# Altium PCB NL_PCB_L.PcbDoc (part 1 of 2)
Units mm, origin at the board's own origin, x right, y up, seen from the top; angles counter-clockwise.
Board outline 403.1 x 406.53 mm, 2 copper layers (Top Layer, Bottom Layer); 55 components, 40 nets, 196 pads, 161 vias.
Unrouted connection lines stored in the file: 46.
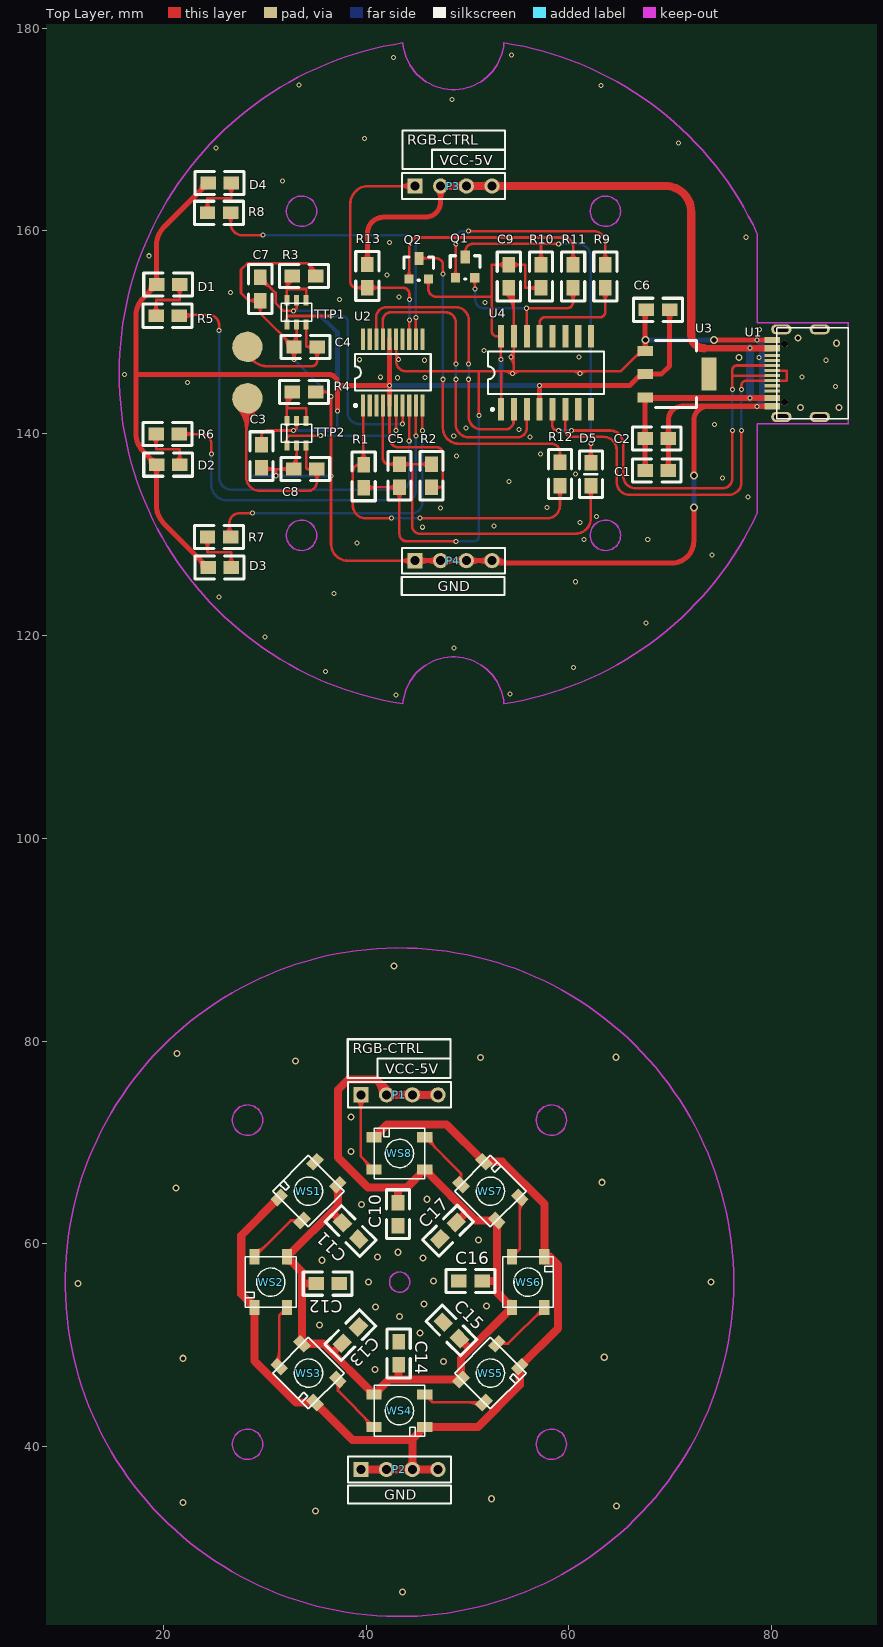
[diagram p0: Top Layer view]
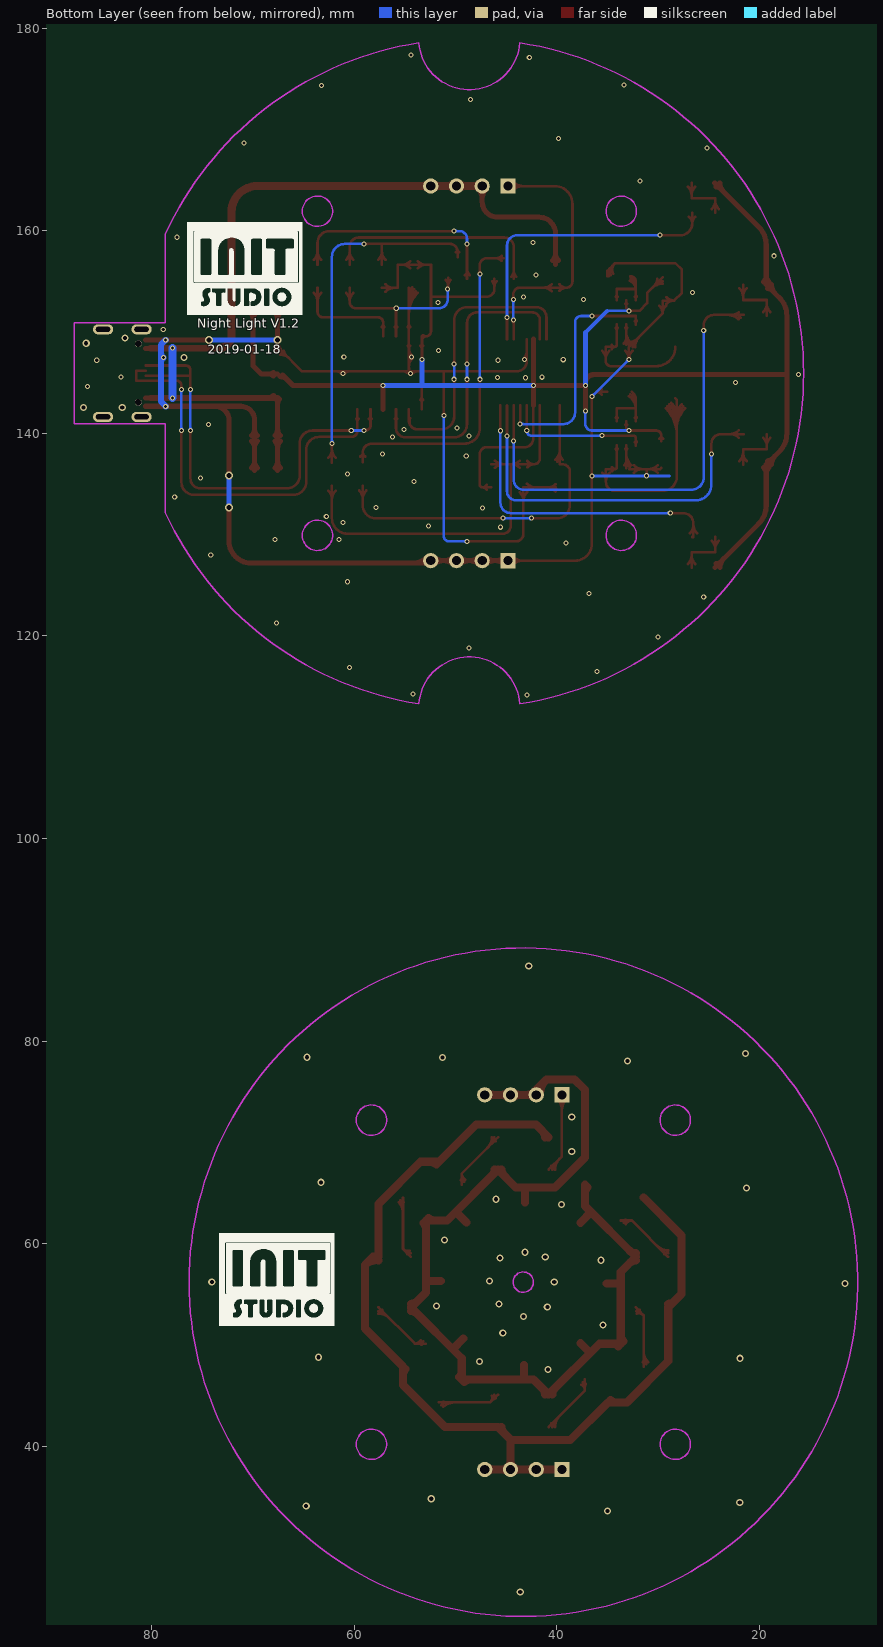
[diagram p1: Bottom Layer view, seen from below]

## Layer stack, top to bottom
Top Layer: signal copper 0.0356
Dielectric: dielectric 0.32, FR-4, Dk 4.8
Bottom Layer: signal copper 0.0356

## Board outline
-159.131,277.876 -89.154,207.899 -89.154,-128.651 190.881,-128.651 233.807,-85.725 243.967,-75.565 243.967,264.287

## Design rules (kind name [scope] priority, off if disabled: settings)
Clearance [All] p1: gap=0.1
PolygonConnect [All] p1: connectstyle=Relief reliefconductorwidth=0.254 reliefentries=4 polygonreliefangle="90 Angle"
RoutingVias [All] p1: holewidth=0.711 width=1.27 viastyle="Through Hole" minholewidth=0.711 minwidth=1.27 maxholewidth=0.711 maxwidth=1.27
SilkscreenOverComponentPads [IsPad] p1: minsilkscreentomaskgap=0.254
SolderMaskExpansion [All] p1: expansion=0.102
Width [All] p1: maxlimit=2 minlimit=0.254 preferedwidth=0.254
27 further rules are at their usual default settings.

## Components (designator, comment, footprint, x,y, rotation, side; value= is the part's Value field where it differs from the comment)
C1 "Cap" 0805 69.825,136.322 r180 top
C2 "Cap" 0805 69.825,139.497 r180 top
C3 "Cap" 0805 29.667,136.601 r90 top
C4 "Cap" 0805 32.868,148.514 r0 top
C5 "Cap" 0805 43.282,134.671 r90 top
C6 "Cap" 0805 67.666,152.197 r0 top
C7 "Cap" 0805 29.54,153.111 r90 top
C8 "Cap" 0805 32.842,136.474 r0 top
C9 "Cap" 0805 54.077,154.356 r90 top
C10 "Cap" 0805 43.129,61.773 r90 top
C11 "Cap" 0805 39.268,60.452 r135 top
C12 "Cap" 0805 37.338,56.058 r180 top
C13 "Cap" 0805 39.243,51.791 r225 top
C14 "Cap" 0805 43.205,50.317 r270 top
C15 "Cap" 0805 47.6,52.248 r315 top
C16 "Cap" 0805 49.149,56.312 r0 top
C17 "Cap" 0805 47.269,60.477 r45 top
D1 "LED0" 0805 19.304,154.686 r0 top
D2 "LED0" 0805 19.304,136.906 r0 top
D3 "LED0" 0805 24.384,126.746 r0 top
D4 "LED0" 0805 24.384,164.719 r0 top
D5 "DIODE" 0805L 62.052,134.823 r90 top
P1 "Header 4" HDR1X4 39.472,74.701 r0 top
P2 "Header 4" HDR1X4 39.472,37.719 r0 top
P3 "Header 4" HDR1X4 44.806,164.414 r0 top
P4 "Header 4" HDR1X4 44.806,127.432 r0 top
Q1 "8050" SOT23 49.759,156.388 r0 top
Q2 "8550" SOT23 45.187,156.261 r0 top
R1 "Res2" 0805 39.751,134.62 r90 top
R2 "Res2" 0805 46.457,136.957 r270 top
R3 "Res2" 0805 35.001,155.524 r180 top
R4 "Res2" 0805 35.001,144.094 r180 top
R5 "Res2" 0805 19.253,151.613 r0 top
R6 "Res2" 0805 19.253,139.929 r0 top
R7 "Res2" 0805 24.333,129.769 r0 top
R8 "Res2" 0805 24.333,161.773 r0 top
R9 "Res2" 0805 63.602,154.356 r90 top (schematic designator R13)
R10 "Res2" 0805 57.252,154.356 r90 top (schematic designator R14)
R11 "Res2" 0805 60.427,156.642 r270 top (schematic designator R15)
R12 "Res2" 0805 59.131,134.849 r90 top (schematic designator R16)
R13 "Res2" 0805 40.107,154.381 r90 top (schematic designator R17)
TTP1 "TTP" SOT23-6L 33.122,151.943 r90 top
TTP2 "TTP" SOT23-6L 33.122,140.005 r90 top
U1 "Type_C_16" Type_C16 82.575,145.948 r0 top
U2 "STM32f030F4P6" SSOP20 42.393,145.974 r90 top
U3 "AMS1117_3.3" SOT-223 67.539,148.133 r270 top
U4 "CH340C" SOP16 57.76,145.974 r0 top
WS1 "WS2812" WS2812 34.301,65.19 r225 top
WS2 "WS2812" WS2812 30.582,56.21 r270 top
WS3 "WS2812" WS2812 34.301,47.23 r315 top
WS4 "WS2812" WS2812 43.282,43.51 r0 top
WS5 "WS2812" WS2812 52.262,47.23 r45 top
WS6 "WS2812" WS2812 55.982,56.21 r90 top
WS7 "WS2812" WS2812 52.262,65.19 r135 top
WS8 "WS2812" WS2812 43.282,68.91 r180 top

## Footprints (in the part's own frame and the unit in brackets; to place one, negate y for a bottom-side part, rotate by r counter-clockwise, add the part's x,y. Pads: shape width x height; smd on the part's side, far side on the other; paste and mask are expansions set on the pad)
0805 [mil]
  rect 60x50 smd: 1(0,0) 2(90,0)
  silkscreen extent -50,-45 140,45
0805L [mil]
  rect 60x50 smd: 1(0,-5) 2(90,-5)
  silkscreen extent -45,-50 135,40
HDR1X4 [mm] "Connector; Header; 4 Position"
  rect 1.5x1.5 hole 0.9: 1(0,0)
  round 1.5 hole 0.9: 2(2.54,0) 3(5.08,0) 4(7.62,0)
  silkscreen extent -1.27,-1.27 8.89,1.27
SOP16 [mm] "Small Outline; 16 Leads; Body Width 5"
  rect 0.6x2.2 smd: 1(-4.445,-3.6) 2(-3.175,-3.6) 3(-1.905,-3.6) 4(-0.635,-3.6) 5(0.635,-3.6) 6(1.905,-3.6) 7(3.175,-3.6) 8(4.445,-3.6) 9(4.445,3.6) 10(3.175,3.6) 11(1.905,3.6) 12(0.635,3.6) 13(-0.635,3.6) 14(-1.905,3.6) 15(-3.175,3.6) 16(-4.445,3.6)
  silkscreen extent -5.73,-3.72 5.73,2.1, body extent -5.1,-3.96 5.1,3.96, height 1.8
SOT23 [mil]
  rect 36x36 smd: B(-37.5,-40) E(37.5,-40)
  rect 36x50 smd: C(0.5,40)
  silkscreen extent -58,-45 58,45, body extent -58,-48 60,56, height 43
SOT23-6L [mm]
  rect 1x0.5 smd: 1(-1.2,0.95) 2(-1.2,0) 3(-1.2,-0.95) 4(1.2,-0.95) 5(1.2,0) 6(1.2,0.95)
  silkscreen extent -0.9,-1.5 0.9,1.5
SOT-223 [mil]
  rect 39x59 smd: 1(0,0) 3(180,0)
  rect 38.98x59.05 smd: 2(90,0)
  rect 129.13x59 smd: 4(90,248.03)
  silkscreen extent -40,40 220,200
SSOP20 [mm]
  rect 2.15x0.4 smd: 1(-3.224,2.696) 2(-3.224,2.046) 3(-3.224,1.396) 4(-3.224,0.746) 5(-3.224,0.096) 6(-3.224,-0.554) 7(-3.224,-1.204) 8(-3.224,-1.854) 9(-3.224,-2.504) 10(-3.224,-3.154) 11(3.326,-3.154) 12(3.326,-2.504) 13(3.326,-1.854) 14(3.326,-1.204) 15(3.326,-0.554) 16(3.326,0.096) 17(3.326,0.746) 18(3.326,1.396) 19(3.326,2.046) 20(3.326,2.696)
  silkscreen extent -3.35,-3.98 1.85,3.57
Type_C16 [mm]
  round 0.65 hole 0.65: 0(-1.28,2.89) 1(-1.28,-2.89)
  rect 1.5x0.6 smd: 1(-2.5,3.275) 2(-2.5,2.45) 11(-2.5,-2.45) 12(-2.5,-3.275)
  rect 1.5x0.3 smd: 3(-2.5,1.75) 4(-2.5,1.25) 5(-2.5,0.75) 6(-2.5,0.25) 7(-2.5,-0.25) 8(-2.5,-0.75) 9(-2.5,-1.25) 10(-2.5,-1.75)
  oval 2x1 hole 0.5 slot 1.4 at 0 deg: ""(-1.6,-4.32) ""(-1.6,4.32) ""(2.2,-4.32) ""(2.2,4.32)
  silkscreen extent -2.05,-4.5 5,4.5
WS2812 [mm]
  rect 1.5x1 smd: 1(-2.5,1.6) 2(-2.5,-1.6) 3(2.5,-1.6) 4(2.5,1.6)
  silkscreen extent -2.5,-2.5 2.5,2.5

## Part data
C1 C2 C3 C4 C5 C6 C7 C8 C9 C10 C11 C12 C13 C14 C15 C16 C17: "Capacitor"
D1 D2 D3 D4: "Typical INFRARED GaAs LED"
D5: library part D
P1 P2 P3 P4: "Header, 4-Pin"
R1 R2 R3 R4 R5 R6 R7 R8 R9 R10 R11 R12 R13: "Resistor"
TTP1 TTP2: library part TT
U1: library part Type_
U3: library part LM317, "3-Terminal Adjustable Positive Voltage Reg"
WS1 WS2 WS3 WS4 WS5 WS6 WS7 WS8: library part WS

## Free pads (board coordinates)
  round 3 smd: 0(28.27,143.459) 1(28.27,148.539)

## Via types
v1: diameter 0.5, hole 0.3, Top Layer to Bottom Layer, 117 vias
v2: diameter 0.7, hole 0.4, Top Layer to Bottom Layer, 40 vias
v3: diameter 0.8, hole 0.5, Top Layer to Bottom Layer, 4 vias

## Nets (pads, with @x,y where several pads share a name; then routed paths per layer and width w, separated by ;. In a path a pad name is that pad's centre, name@x,y a point inside that pad or via, vN(x,y) a via of type N, cw(c..) or ccw(c..) an arc to the next point about the centre after c; other vN are vias at no path point)
5V: C1.2 C2.2 C10.2 C11.2 C12.2 C13.2 C14.2 C15.2 C16.2 C17.2 P1.2 P1.3 P1.4 P3.2 P3.3 P3.4 R13.2 U1.2 U1.11 U3.3 WS1.1 WS2.1 WS3.1 WS4.1 WS5.1 WS6.1 WS7.1 WS8.1 | length 223
  Top Layer w0.5: R13.2@39.834,157.066 ccw(c39.177,157.724) 40.107,157.724 ccw(c41.036,157.724) R13.2@40.379,157.066 ; R13.2@40.107,156.667 40.107,159.715 cw(c41.732,159.715) 41.732,161.341 45.822,161.341 ccw(c45.822,162.865) 47.346,162.865 P3.2@47.346,164.414 ; P3.2@46.992,164.061 cw(c46.138,163.207) 47.346,163.207 cw(c48.553,163.207) P3.2@47.699,164.061 ; C1.2@67.266,136.594 ccw(c66.609,137.251) 67.539,137.251 ccw(c68.468,137.251) C1.2@67.811,136.594 ; C2.2@67.266,139.225 cw(c66.609,138.567) 67.539,138.567 cw(c68.468,138.567) C2.2@67.811,139.225 ; C2.2@67.266,139.769 ccw(c66.609,140.426) 67.539,140.426 ccw(c68.468,140.426) C2.2@67.811,139.769 ; U3.3@67.365,143.387 cw(c66.946,142.969) 67.539,142.969 cw(c68.131,142.969) U3.3@67.712,143.387 ; C1.2@67.539,136.322 C2.2@67.539,139.497 U3.3@67.539,143.561 ; U1.11@80.075,143.498 U1.11@80.575,143.498 ; U1.2@80.075,148.398 U1.2@80.575,148.398
  Top Layer w0.6: U3.3@67.539,143.498 U1.11@80.075,143.498 ; U3.3@67.931,143.699 ccw(c68.415,144.183) 68.415,143.498 ; 73.355,148.398 U1.2@80.075,148.398
  Top Layer w0.8: WS2.1@32.182,58.36 cw(c32.182,57.515) 32.779,58.113 ; WS2.1@32.182,59.06 ccw(c32.182,59.905) 32.779,59.308 ; WS3.1@33.417,50.377 ccw(c32.82,50.974) 33.665,50.974 ; 33.817,56.058 C12.2@35.052,56.058 ; WS3.1@33.912,49.882 cw(c34.51,49.284) 34.51,50.129 ; 36.596,63.125 C11.2@37.652,62.068 ; 36.743,49.29 C13.2@37.627,50.174 ; WS1.1@36.953,65.579 cw(c36.356,64.982) 37.2,64.982 ; WS1.1@37.2,65.827 37.2,63.729 WS2.1@32.182,58.71 33.665,57.227 WS3.1@33.665,50.129 35.763,50.129 WS4.1@40.782,45.11 42.265,46.594 WS5.1@49.363,46.594 49.363,48.691 WS6.1@54.382,53.71 52.898,55.194 WS7.1@52.898,62.291 50.8,62.291 WS8.1@45.782,67.31 44.029,65.557 40.157,65.557 37.2,68.514 37.2,75.199 38.227,76.225 40.996,76.225 42.012,75.209 P1.2@42.012,74.701 P1.4@47.092,74.701 ; 40.184,45.708 cw(c39.587,45.11) WS4.1@40.432,45.11 ; 41.055,76.166 cw(c39.59,74.701) P1.2@41.662,74.701 ; WS4.1@41.132,45.11 cw(c41.977,45.11) 41.379,45.708 ; P1.2@42.259,74.454 cw(c42.857,73.856) 42.857,74.701 cw(c42.857,75.546) P1.2@42.259,74.949 ; C10.2@43.129,64.059 43.129,65.532 ; 43.205,46.695 C14.2@43.205,48.031 ; P1.3@44.304,74.454 ccw(c43.707,73.856) 43.707,74.701 ccw(c43.707,75.546) P1.3@44.304,74.949 ; P1.3@44.799,74.454 cw(c45.397,73.856) 45.397,74.701 cw(c45.397,75.546) P1.3@44.799,74.949 ; 45.184,66.713 ccw(c44.587,67.31) WS8.1@45.432,67.31 ; WS8.1@46.132,67.31 ccw(c46.977,67.31) 46.379,66.713 ; P1.4@46.844,74.454 ccw(c46.247,73.856) 46.247,74.701 ccw(c46.247,75.546) P1.4@46.844,74.949 ; P3.2@47.346,164.414 69.545,164.414 cw(c69.545,161.874) 72.085,161.874 72.085,149.668 ccw(c73.355,149.668) 73.355,148.398 ; P3.2@47.593,164.167 cw(c48.191,163.569) 48.191,164.414 cw(c48.191,165.259) P3.2@47.593,164.662 ; 48.518,46.594 cw(c48.518,45.749) WS5.1@49.115,46.346 ; C17.2@48.886,62.094 49.929,63.137 ; C15.2@49.216,50.631 50.221,49.626 ; 49.363,47.439 ccw(c50.208,47.439) WS5.1@49.61,46.841 ; P3.3@49.638,164.167 ccw(c49.041,163.569) 49.041,164.414 ccw(c49.041,165.259) P3.3@49.638,164.662 ; P3.3@50.133,164.167 cw(c50.731,163.569) 50.731,164.414 cw(c50.731,165.259) P3.3@50.133,164.662 ; C16.2@51.435,56.312 52.771,56.312 ; 52.053,62.291 ccw(c52.053,63.136) WS7.1@52.651,62.539 ; P3.4@52.178,164.167 ccw(c51.581,163.569) 51.581,164.414 ccw(c51.581,165.259) P3.4@52.178,164.662 ; P3.4@52.673,164.167 cw(c53.271,163.569) 53.271,164.414 cw(c53.271,165.259) P3.4@52.673,164.662 ; 52.898,61.446 cw(c53.743,61.446) WS7.1@53.146,62.044 ; 53.784,53.113 cw(c54.382,52.515) WS6.1@54.382,53.36 ; 53.784,54.308 ccw(c54.382,54.905) WS6.1@54.382,54.06
  Bottom Layer w0.8: v1(77.902,143.51) v1(77.902,148.412)
BOOT0: R1.2 R12.1 U2.1 | length 40.7
  Top Layer w0.254: R1.2@39.392,137.392 ccw(c38.657,138.127) 39.696,138.127 ; 39.696,137.779 ccw(c40.497,137.779) R1.2@39.931,137.213 ; 39.696,138.392 ccw(c41.11,138.392) R1.2@40.11,137.392 ; U2.1@39.696,142.75 39.696,136.957 39.446,136.957 ccw(c39.446,136.195) 38.684,136.195 38.684,132.893 ccw(c39.954,132.893) 39.954,131.623 v1(42.494,131.623) ; v1@42.407,131.536 ccw(c42.197,131.326) 42.197,131.623 ccw(c42.197,131.92) v1@42.407,131.71 ; v1(45.288,131.623) 57.861,131.623 ccw(c57.861,132.893) 59.131,132.893 R12.1@59.131,134.849 ; v1@45.375,131.536 cw(c45.585,131.326) 45.585,131.623 cw(c45.585,131.92) v1@45.375,131.71 ; R12.1@58.772,134.362 cw(c57.905,133.495) 59.131,133.495 cw(c60.358,133.495) R12.1@59.49,134.362
  Bottom Layer w0.254: v1(42.494,131.623) v1(45.288,131.623) ; v1@42.581,131.536 cw(c42.791,131.326) 42.791,131.623 cw(c42.791,131.92) v1@42.581,131.71 ; v1@45.201,131.536 ccw(c44.991,131.326) 44.991,131.623 ccw(c44.991,131.92) v1@45.201,131.71
CH340_RX: U2.17 U4.3 | length 32.8
  Top Layer w0.254: U2.17@41.646,149.3 41.646,151.181 cw(c42.408,151.181) 42.408,151.943 47.828,151.943 cw(c47.828,150.927) 48.844,150.927 v1(48.844,146.863) ; v1@48.757,145.252 cw(c48.547,145.042) 48.844,145.042 cw(c49.141,145.042) v1@48.931,145.252 ; v1@48.757,146.95 ccw(c48.547,147.16) 48.844,147.16 ccw(c49.141,147.16) v1@48.931,146.95 ; v1(48.844,145.339) 48.844,140.894 ccw(c50.114,140.894) 50.114,139.624 54.966,139.624 ccw(c54.966,140.513) 55.855,140.513 U4.3@55.855,142.374 ; U4.3@55.732,141.451 cw(c55.437,141.156) 55.855,141.156 cw(c56.272,141.156) U4.3@55.977,141.451
  Bottom Layer w0.254: v1@48.757,145.426 ccw(c48.547,145.636) 48.844,145.636 ccw(c49.141,145.636) v1@48.931,145.426 ; v1@48.757,146.776 cw(c48.547,146.566) 48.844,146.566 cw(c49.141,146.566) v1@48.931,146.776 ; v1(48.844,145.339) v1(48.844,146.863)
CH340_TX: U2.18 U4.2 | length 31.3
  Top Layer w0.254: U2.18@40.996,149.3 40.996,151.461 cw(c41.986,151.461) 41.986,152.451 48.844,152.451 cw(c48.844,151.181) 50.114,151.181 v1(50.114,146.863) ; v1@50.027,145.252 cw(c49.817,145.042) 50.114,145.042 cw(c50.411,145.042) v1@50.201,145.252 ; v1@50.027,146.95 ccw(c49.817,147.16) 50.114,147.16 ccw(c50.411,147.16) v1@50.201,146.95 ; v1(50.114,145.339) 50.114,141.656 ccw(c51.384,141.656) 51.384,140.386 53.696,140.386 ccw(c53.696,141.275) 54.585,141.275 U4.2@54.585,142.374 ; U4.2@54.435,141.487 cw(c53.844,141.146) 54.503,140.97
  Bottom Layer w0.254: v1@50.027,145.426 ccw(c49.817,145.636) 50.114,145.636 ccw(c50.411,145.636) v1@50.201,145.426 ; v1@50.027,146.776 cw(c49.817,146.566) 50.114,146.566 cw(c50.411,146.566) v1@50.201,146.776 ; v1(50.114,145.339) v1(50.114,146.863)
GND: C1.1 C2.1 C3.1 C4.1 C5.1 C6.1 C7.1 C8.1 C9.1 C10.1 C11.1 C12.1 C13.1 C14.1 C15.1 C16.1 C17.1 P2.1 P2.2 P2.3 P2.4 P4.1 P4.2 P4.3 P4.4 R1.1 R3.1 R4.1 TTP1.2 TTP2.2 U1.1@80.075,149.223 U1.12 U2.15 U3.1 U4.1 U4.15 WS1.3 WS2.3 WS3.3 WS4.3 WS5.3 WS6.3 WS7.3 WS8.3 | length 421.5
  Top Layer w0.254: C7.1@29.163,152.771 ccw(c28.397,152.079) 28.397,153.111 ; C7.1@29.163,153.452 cw(c28.397,154.143) 28.397,153.111 ; C7.1@29.2,152.607 cw(c28.508,151.841) 29.54,151.841 ; C3.1@29.667,136.601 29.794,136.474 31.115,136.474 ; C7.1@29.881,152.607 ccw(c30.572,151.841) 29.54,151.841 ; C3.1@30.026,136.115 cw(c30.894,135.248) 30.894,136.474 cw(c30.894,137.701) C3.1@30.026,136.833 ; v1@31.028,135.901 ccw(c30.818,136.111) 31.115,136.111 ccw(c31.412,136.111) v1@31.202,135.901 ; v1(31.115,135.814) 31.115,136.474 ; 31.784,149.598 cw(c30.7,148.514) C4.1@32.233,148.514 ; 32.09,149.291 ccw(c32.741,149.942) C4.1@32.741,149.022 ; 32.217,149.164 cw(c31.567,148.514) C4.1@32.487,148.514 ; C8.1@32.356,136.115 ccw(c31.489,135.248) 31.489,136.474 ccw(c31.489,137.701) C8.1@32.356,136.833 ; C4.1@32.51,148.153 cw(c31.659,147.295) v1(32.868,147.295) ; C8.1@32.61,136.833 ccw(c31.375,138.069) 33.122,138.069 ; C4.1@32.635,148.873 ccw(c31.462,150.047) 33.122,150.047 ; v1@32.761,147.356 ccw(c32.504,147.505) 32.791,147.581 ; v1@32.781,147.382 ccw(c32.571,147.592) 32.868,147.592 ccw(c33.165,147.592) v1@32.955,147.382 ; C8.1@32.79,136.654 ccw(c31.988,137.455) 33.122,137.455 ; 32.791,147.581 ccw(c33.078,147.658) v1@32.929,147.401 ; v1@32.806,147.401 ccw(c32.658,147.658) 32.944,147.581 ; C4.1@32.815,148.693 ccw(c32.075,149.434) 33.122,149.434 ccw(c33.914,149.434) C4.1@33.354,148.873 ; C8.1@32.842,136.474 31.115,136.474 ; 32.944,147.581 ccw(c33.231,147.505) v1@32.974,147.356 ; TTP2.2@33.035,138.468 cw(c32.825,138.258) 33.122,138.258 cw(c33.419,138.258) TTP2.2@33.209,138.468 ; TTP1.2@33.035,150.406 cw(c32.825,150.196) 33.122,150.196 cw(c33.419,150.196) TTP1.2@33.209,150.406 ; C8.1@33.122,136.576 TTP2.2@33.122,138.805 ; 33.122,137.333 ccw(c33.828,137.333) C8.1@33.328,136.833 ; C4.1@33.122,148.768 TTP1.2@33.122,150.743 ; C4.1@33.225,148.153 ccw(c34.076,147.295) v1(32.868,147.295) ; R3.1@34.417,155.745 ccw(c33.59,156.145) 34.239,156.794 ; 34.492,156.541 cw(c33.931,155.98) R3.1@34.645,155.635 ; 34.745,156.289 cw(c34.272,155.815) R3.1@34.874,155.524 ; R4.1@35.001,144.094 36.068,144.094 ; R3.1@35.001,155.524 35.001,156.032 34.239,156.794 ; R4.1@35.553,143.816 cw(c36.068,143.479) 36.068,144.094 ; R4.1@35.553,144.372 ccw(c36.068,144.709) 36.068,144.094 ; v1@36.402,143.637 ccw(c36.105,143.637) 36.315,143.847 ccw(c36.525,144.057) v1@36.525,143.76 ; v1@36.438,135.701 cw(c36.228,135.491) 36.525,135.491 cw(c36.822,135.491) v1@36.612,135.701 ; v1@36.438,135.875 ccw(c36.228,136.085) 36.525,136.085 ccw(c36.822,136.085) v1@36.612,135.875 ; v1@36.438,143.55 cw(c36.228,143.34) 36.525,143.34 cw(c36.822,143.34) v1@36.612,143.55 ; R1.1@39.931,134.44 cw(c40.487,133.884) 40.487,134.671 ; R1.1@40.107,134.671 C5.1@43.282,134.671 43.282,130.073 ccw(c44.018,130.073) 44.018,129.337 v1(48.844,129.337) ; R1.1@40.11,134.261 cw(c41.1,133.271) 41.1,134.671 ; R1.1@40.11,134.979 ccw(c40.855,135.724) 40.855,134.671 ; C5.1@42.922,134.185 cw(c42.055,133.317) 43.282,133.317 cw(c44.508,133.317) C5.1@43.641,134.185 ; C5.1@42.922,134.312 ccw(c42.055,133.444) 42.055,134.671 ccw(c42.055,135.897) C5.1@42.922,135.03 ; 42.946,147.543 ccw(c43.428,147.543) v1@43.087,147.202 ; 42.946,148.156 ccw(c44.041,148.156) v1@43.267,147.382 ; U2.15@42.946,149.3 42.946,147.117 ccw(c43.937,147.117) 43.937,146.126 51.13,146.126 ; P4.1@44.365,126.991 ccw(c43.302,125.928) 43.302,127.432 ccw(c43.302,128.936) P4.1@44.365,127.872 ; P4.1@44.545,127.171 ccw(c43.915,126.541) 43.915,127.432 ccw(c43.915,128.323) P4.1@44.545,127.693 ; P4.1@44.806,127.076 ccw(c44.806,127.432) P4.1@45.161,127.432 ; P4.1@44.806,127.432 38.176,127.432 cw(c38.176,129.083) 36.525,129.083 v1(36.525,135.788) v1(36.525,143.637) 36.068,144.094 ; v1@48.757,129.25 ccw(c48.547,129.04) 48.547,129.337 ccw(c48.547,129.634) v1@48.757,129.424 ; v1@51.043,141.87 ccw(c50.833,142.08) 51.13,142.08 ccw(c51.427,142.08) v1@51.217,141.87 ; v1(51.13,141.783) 51.13,146.126 ; U4.1@53.192,143.296 ccw(c52.897,143.591) 53.315,143.591 ccw(c53.732,143.591) U4.1@53.437,143.296 ; U4.1@53.315,142.374 53.315,146.053 53.388,146.126 65.126,146.126 67.132,148.133 U3.1@67.539,148.133 ; 53.315,146.126 51.13,146.126 ; 53.588,146.126 cw(c53.588,145.049) v1@54.35,145.811 ; C9.1@53.717,153.87 cw(c51.624,151.776) 54.585,151.776 ; C9.1@53.897,154.049 cw(c52.237,152.389) 54.585,152.389 ; C9.1@54.077,154.229 cw(c52.85,153.002) 54.585,153.002 ; 54.202,146.126 cw(c54.202,145.662) v1@54.53,145.99 ; v1@54.218,147.436 cw(c53.334,146.552) 54.585,146.552 ; v1@54.218,147.61 ccw(c53.334,148.495) U4.15@54.585,148.495 ; C9.1@54.256,154.408 cw(c53.463,153.616) C9.1@54.585,153.616 ; v1@54.345,145.99 cw(c54.673,145.662) 54.673,146.126 ; v1@54.35,145.985 ccw(c53.784,146.55) 54.585,146.55 ; v1@54.398,147.431 ccw(c53.947,147.881) 54.585,147.881 ; v1@54.398,147.616 cw(c53.947,147.165) 54.585,147.165 ; U4.15@54.462,148.651 cw(c54.167,148.356) 54.585,148.356 cw(c55.002,148.356) U4.15@54.707,148.651 ; U4.15@54.462,150.496 ccw(c54.167,150.791) 54.585,150.791 ccw(c55.002,150.791) U4.15@54.707,150.496 ; v1@54.524,145.811 cw(c55.286,145.049) 55.286,146.126 ; 54.585,146.152 U4.15@54.585,149.574 C9.1@54.585,154.356 ; 60.299,146.126 cw(c60.299,145.135) v1@61,145.836 ; 60.913,146.126 cw(c60.913,145.749) v1@61.18,146.016 ; v1@60.994,146.016 cw(c61.261,145.749) 61.261,146.126 ; v1@61.174,145.836 cw(c61.875,145.135) 61.875,146.126 ; 66.396,147.396 cw(c67.285,146.507) U3.1@67.285,147.764 ; 66.764,147.764 ccw(c66.395,148.133) U3.1@66.916,148.133 ; U3.1@66.829,147.83 cw(c67.285,147.375) U3.1@67.285,148.018 ; 28.397,153.111 C7.1@29.54,153.111 29.54,151.841 ; 28.397,153.111 27.635,153.873 27.635,156.159 28.27,156.794 34.239,156.794 ; 29.54,151.841 C4.1@32.868,148.514 v1(32.868,147.295)
  Top Layer w0.5: P4.1@44.806,127.076 P4.1@44.806,127.432 45.161,127.432 P4.2@47.346,127.432 P4.4@52.426,127.432 52.654,127.203 70.18,127.203 ccw(c70.18,129.362) 72.339,129.362 v3(72.339,132.664) ; P4.1@45.159,127.078 cw(c46.013,126.225) 46.013,127.432 cw(c46.013,128.639) P4.1@45.159,127.785 ; P4.2@46.992,127.078 ccw(c46.138,126.225) 46.138,127.432 ccw(c46.138,128.639) P4.2@46.992,127.785 ; P4.2@47.699,127.078 cw(c48.553,126.225) 48.553,127.432 cw(c48.553,128.639) P4.2@47.699,127.785 ; P4.3@49.532,127.078 ccw(c48.679,126.225) 48.679,127.432 ccw(c48.679,128.639) P4.3@49.532,127.785 ; P4.3@50.239,127.078 cw(c51.093,126.225) 51.093,127.432 cw(c51.093,128.639) P4.3@50.239,127.785 ; P4.4@52.072,127.078 ccw(c51.219,126.225) 51.219,127.432 ccw(c51.218,128.639) P4.4@52.072,127.785 ; P4.4@52.779,127.785 ccw(c54.185,129.191) 54.185,127.203 ; C6.1@67.266,151.925 cw(c66.609,151.267) 67.539,151.267 cw(c68.468,151.267) C6.1@67.811,151.925 ; U3.1@67.365,148.306 ccw(c66.946,148.725) 67.539,148.725 ccw(c68.131,148.725) U3.1@67.712,148.306 ; U3.1@67.539,148.133 C6.1@67.539,152.197 ; 67.539,148.804 cw(c67.982,148.804) v3@67.668,149.117 ; 67.539,149.643 ccw(c67.982,149.643) v3@67.668,149.329 ; C1.1@69.552,136.594 ccw(c68.895,137.251) 69.825,137.251 ccw(c70.754,137.251) C1.1@70.097,136.594 ; C2.1@69.552,139.225 cw(c68.895,138.567) 69.825,138.567 cw(c70.754,138.567) C2.1@70.097,139.225 ; C2.1@69.552,139.769 ccw(c68.895,140.426) 69.825,140.426 ccw(c70.754,140.426) C2.1@70.097,139.769 ; C1.1@69.825,136.322 C2.1@69.825,139.497 69.825,141.326 cw(c71.172,141.326) 71.172,142.673 73.736,142.673 ; v3(72.339,135.839) 72.339,141.276 cw(c73.736,141.276) 73.736,142.673 ; v3(74.322,149.223) v1(78.588,149.223) U1.1@80.075,149.223 U1.1@80.575,149.223 ; U1.12@80.575,142.673 U1.12@80.075,142.673 73.736,142.673
  Top Layer w0.8: 28.384,54.308 ccw(c28.982,54.905) WS2.3@28.982,54.06 ; WS1.3@31.402,64.554 27.661,60.812 27.661,55.031 WS2.3@28.982,53.71 28.982,48.412 33.063,44.331 WS3.3@34.938,44.331 38.654,40.615 44.486,40.615 WS4.3@45.782,41.91 51.029,41.91 55.161,46.042 WS5.3@55.161,47.866 58.928,51.633 58.928,57.912 ; 34.093,44.331 ccw(c34.093,45.176) WS3.3@34.69,44.578 ; P2.1@39.472,37.719 P2.2@42.012,37.719 P2.4@47.092,37.719 ; P2.1@39.719,37.472 cw(c40.317,36.874) 40.317,37.719 cw(c40.317,38.564) P2.1@39.719,37.966 ; WS8.3@40.782,70.51 42.052,71.78 47.935,71.78 WS7.3@51.625,68.09 53.424,68.09 57.582,63.932 WS6.3@57.582,58.71 58.13,58.71 58.928,57.912 ; WS8.3@41.132,70.51 cw(c41.977,70.51) 41.379,71.108 ; P2.2@41.764,37.472 ccw(c41.167,36.874) 41.167,37.719 ccw(c41.167,38.564) P2.2@41.764,37.966 ; P2.2@42.259,37.472 cw(c42.857,36.874) 42.857,37.719 cw(c42.857,38.564) P2.2@42.259,37.966 ; P2.3@44.304,37.472 ccw(c43.707,36.874) 43.707,37.719 ccw(c43.707,38.564) 44.304,37.966 ccw(c43.707,38.564) 44.552,38.564 ccw(c45.397,38.564) 44.799,37.966 ccw(c45.397,38.564) 45.397,37.719 ccw(c45.397,36.874) P2.3@44.799,37.472 ; P2.3@44.552,37.719 44.552,40.549 ; 45.184,41.313 ccw(c44.587,41.91) WS4.3@45.432,41.91 ; P2.4@46.844,37.472 ccw(c46.247,36.874) 46.247,37.719 ccw(c46.247,38.564) P2.4@46.844,37.966 ; WS7.3@51.873,67.842 cw(c52.47,67.245) 52.47,68.09 ; WS5.3@54.914,47.619 cw(c54.316,47.021) 55.161,47.021 ; WS6.3@57.595,58.361 cw(c57.809,56.793) 58.928,57.912
  Bottom Layer w0.254: 28.854,135.788 v1(36.525,135.788) ; 30.757,135.788 ccw(c30.757,136.172) v1@31.028,135.901 ; v1@31.202,135.901 ccw(c31.473,136.172) 31.473,135.788 ; v1@32.842,147.269 ccw(c32.842,147.295) v1(32.868,147.295) v1(36.525,143.637) ; v1@32.868,147.172 cw(c32.868,146.875) 33.078,147.085 cw(c33.288,147.295) v1@32.991,147.295 ; v1@36.402,143.637 ccw(c36.105,143.637) 36.315,143.847 ccw(c36.525,144.057) v1@36.525,143.76 ; v1@36.438,135.701 ccw(c36.228,135.491) 36.228,135.788 ccw(c36.228,136.085) v1@36.438,135.875 ; v1(48.844,129.337) 50.622,129.337 ccw(c50.622,129.845) 51.13,129.845 v1(51.13,141.783) ; v1@48.931,129.25 cw(c49.141,129.04) 49.141,129.337 cw(c49.141,129.634) v1@48.931,129.424 ; v1@51.043,141.696 cw(c50.833,141.486) 51.13,141.486 cw(c51.427,141.486) v1@51.217,141.696
  Bottom Layer w0.5: v3(67.562,149.223) v3(74.322,149.223) ; v3(72.339,132.664) v3(72.339,135.839) ; v1@78.562,149.198 v1(78.588,149.223)
  Bottom Layer w0.6: v1(78.588,142.672) 79.07,143.154 79.07,148.741 v1(78.588,149.223) ; v1@78.826,147.437 ccw(c78.237,148.026) 79.07,148.026 ; v1@78.826,147.508 cw(c78.237,146.919) 79.07,146.919
  other v1: 42.926,114.173 54.178,114.249 35.992,116.484 60.452,116.893 48.666,118.821 29.997,119.888 67.64,121.26 25.476,123.85 36.805,124.206 60.655,125.349 74.143,127.991 39.091,129.184 61.493,129.502 67.793,129.515 45.542,130.734 52.629,130.861 61.087,131.216 62.738,131.801 47.32,132.613 57.836,132.664 77.699,133.706 54.077,135.23 75.159,135.585 60.655,135.991 48.92,137.764 57.201,137.973 56.185,139.624 48.641,139.725 55.067,140.36 49.835,140.513 74.371,140.894 86.309,144.628 22.352,145.034 43.078,145.491 45.822,145.517 41.427,145.542 83.007,145.567 16.129,145.796 54.437,145.898 61.087,145.923 45.771,147.218 85.395,147.218 39.345,147.269 43.18,147.295 78.791,147.472 54.305,147.523 61.011,147.523 51.638,148.158 78.831,150.241 51.714,152.931 37.363,153.213 43.256,153.467 26.594,153.899 42.037,155.651 18.542,157.531 42.316,158.826 77.495,159.36 31.75,164.897 25.171,168.173 70.841,168.681 39.827,169.129 48.489,172.974 63.195,174.32 33.35,174.371 42.697,177.089 54.356,177.368
  other v2: 43.586,25.603 34.988,33.604 64.719,34.112 21.92,34.447 52.375,34.823 40.869,47.574 47.625,48.387 21.895,48.692 63.5,48.793 45.314,51.181 35.408,51.968 43.282,52.832 40.919,53.746 51.867,53.848 45.695,54.051 11.532,56.058 40.234,56.21 74.041,56.21 46.634,56.312 35.636,58.369 45.588,58.572 41.123,58.699 43.129,59.157 51.079,60.35 39.522,63.856 45.999,64.389 21.234,65.507 63.271,66.065 38.506,69.088 38.506,72.517 33.02,78.054 51.262,78.384 64.643,78.41 21.336,78.791 42.748,87.427 82.88,142.545 86.69,142.545 76.784,147.498 86.436,148.895 82.626,149.403
KEY1_PAD: C4.2 pad.1 TTP1.3 | length 16.1
  Top Layer w0.254: pad.1@28.27,148.539 ccw(c30.175,148.539) 30.175,146.634 34.62,146.634 ccw(c34.62,147.168) 35.154,147.168 C4.2@35.154,148.514 ccw(c35.128,148.514) 35.128,148.539 34.239,148.539 ; TTP1.3@33.985,150.406 cw(c33.775,150.196) 34.072,150.196 cw(c34.369,150.196) TTP1.3@34.159,150.406 ; TTP1.3@34.072,150.743 34.072,148.707 ccw(c34.239,148.707) 34.239,148.539 ; C4.2@34.555,148.325 ccw(c34.239,148.199) 34.239,148.539 ; C4.2@34.574,148.744 cw(c34.239,148.915) 34.239,148.539 ; C4.2@34.794,148.155 cw(c33.927,147.287) 35.154,147.287 cw(c36.38,147.287) C4.2@35.513,148.155
KEY2_PAD: C8.2 pad.0 TTP2.3 | length 38
  Top Layer w0.254: pad.0@27.299,142.488 cw(c25.262,140.451) 28.143,140.451 cw(c31.278,140.451) pad.0@29.061,142.668 ; pad.0@27.479,142.668 cw(c25.875,141.064) 28.143,141.064 cw(c30.665,141.064) pad.0@28.882,142.848 ; pad.0@27.659,142.848 cw(c26.489,141.678) 28.143,141.678 cw(c30.052,141.678) pad.0@28.702,143.027 ; 28.143,139.838 cw(c31.892,139.838) pad.0@29.241,142.488 ; pad.0@28.27,143.459 28.143,143.332 28.143,135.712 ccw(c29.54,135.712) 29.54,134.315 34.239,134.315 ccw(c34.239,135.204) 35.128,135.204 C8.2@35.128,136.474 34.239,136.474 ; TTP2.3@33.985,138.468 cw(c33.775,138.258) 34.072,138.258 cw(c34.369,138.258) TTP2.3@34.159,138.468 ; TTP2.3@34.072,138.805 34.072,136.642 ccw(c34.239,136.642) 34.239,136.474 ; C8.2@34.532,136.279 ccw(c34.239,136.157) 34.239,136.474 ; C8.2@34.532,136.67 cw(c34.239,136.792) 34.239,136.474 ; C8.2@34.769,136.115 cw(c33.902,135.248) 35.128,135.248 cw(c36.355,135.248) C8.2@35.487,136.115
LED1: R5.2 U2.8 | length 51.4
  Top Layer w0.254: R5.2@21.539,151.689 24.46,151.689 cw(c24.46,150.673) 25.476,150.673 v1(25.476,150.165) ; R5.2@21.846,151.433 cw(c22.463,150.815) 22.463,151.689 ; R5.2@22.025,151.253 cw(c23.077,150.202) 23.077,151.689 ; R5.2@22.025,151.972 ccw(c22.709,152.655) 22.709,151.689 ; v1@25.389,150.252 ccw(c25.179,150.462) 25.476,150.462 ccw(c25.773,150.462) v1@25.563,150.252 ; v1@44.159,139.33 ccw(c43.949,139.54) 44.246,139.54 ccw(c44.543,139.54) v1@44.333,139.33 ; v1(44.246,139.243) U2.8@44.246,142.75
  Bottom Layer w0.254: v1@25.389,150.078 cw(c25.179,149.868) 25.476,149.868 cw(c25.773,149.868) v1@25.563,150.078 ; v1(25.476,150.165) 25.476,135.687 ccw(c26.746,135.687) 26.746,134.417 43.23,134.417 ccw(c43.23,135.433) 44.246,135.433 v1(44.246,139.243) ; v1@44.159,139.156 cw(c43.949,138.946) 44.246,138.946 cw(c44.543,138.946) v1@44.333,139.156
LED2: R6.2 U2.9 | length 41.6
  Top Layer w0.254: R6.2@21.539,139.929 23.774,139.929 cw(c23.774,138.989) 24.714,138.989 v1(24.714,137.973) ; R6.2@22.025,139.569 cw(c22.893,138.702) 22.893,139.929 cw(c22.893,141.155) R6.2@22.025,140.288 ; v1@24.627,138.06 ccw(c24.417,138.27) 24.714,138.27 ccw(c25.011,138.27) v1@24.801,138.06 ; v1@44.809,139.838 ccw(c44.599,140.048) 44.896,140.048 ccw(c45.193,140.048) v1@44.983,139.838 ; v1(44.896,139.751) U2.9@44.896,142.75
  Bottom Layer w0.254: v1@24.627,137.886 cw(c24.417,137.676) 24.714,137.676 cw(c25.011,137.676) v1@24.801,137.886 ; v1(24.714,137.973) 24.714,134.925 ccw(c26.238,134.925) 26.238,133.401 44.018,133.401 ccw(c44.018,134.279) 44.896,134.279 v1(44.896,139.751) ; v1@44.809,139.664 cw(c44.599,139.454) 44.896,139.454 cw(c45.193,139.454) v1@44.983,139.664